# EAGLE board AVR-Pocket-Programmer-Panel-v11 (EAGLE 6.5.0), part 1 of 2
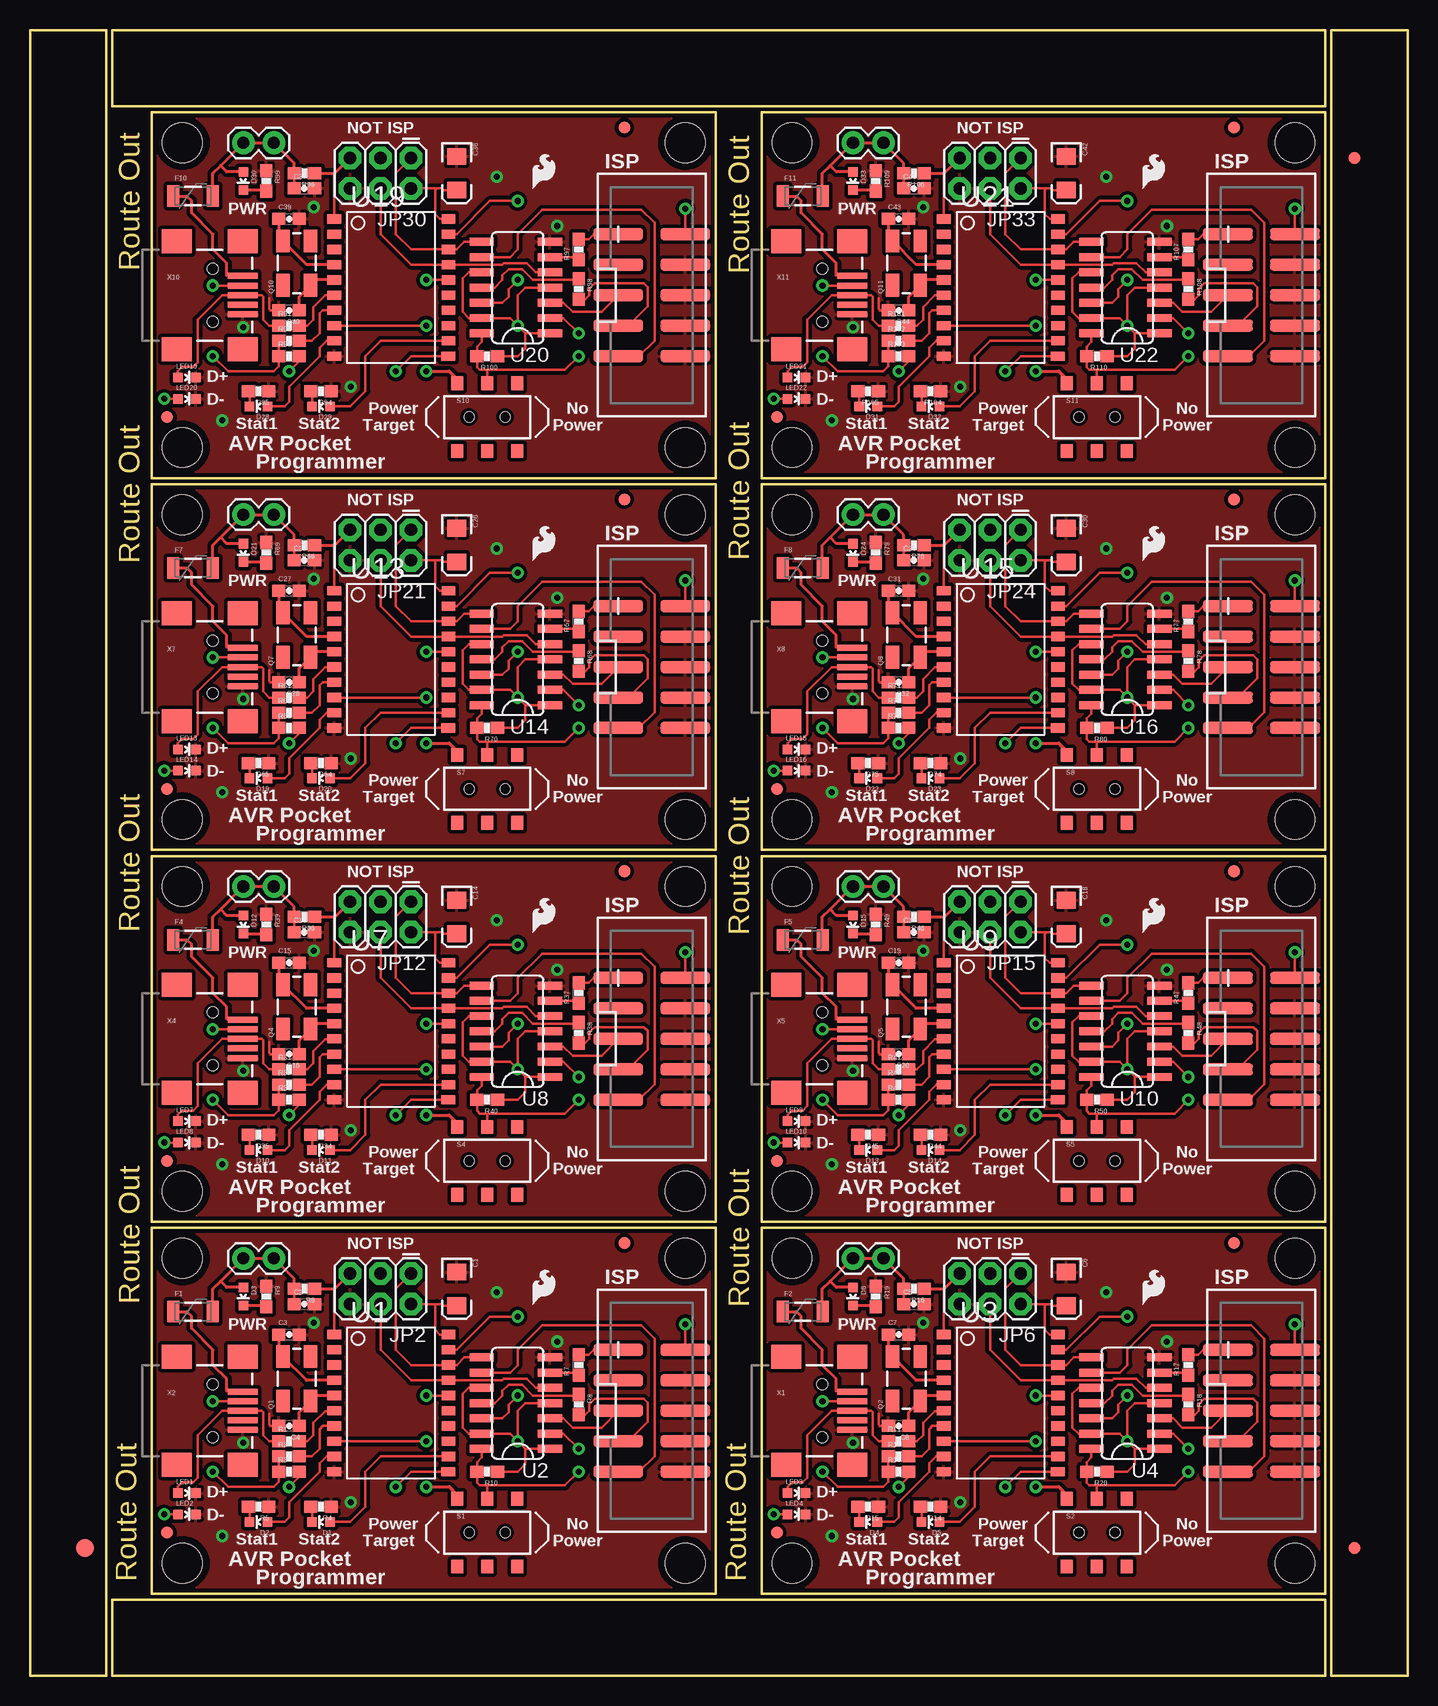
[diagram p0: board, top side]
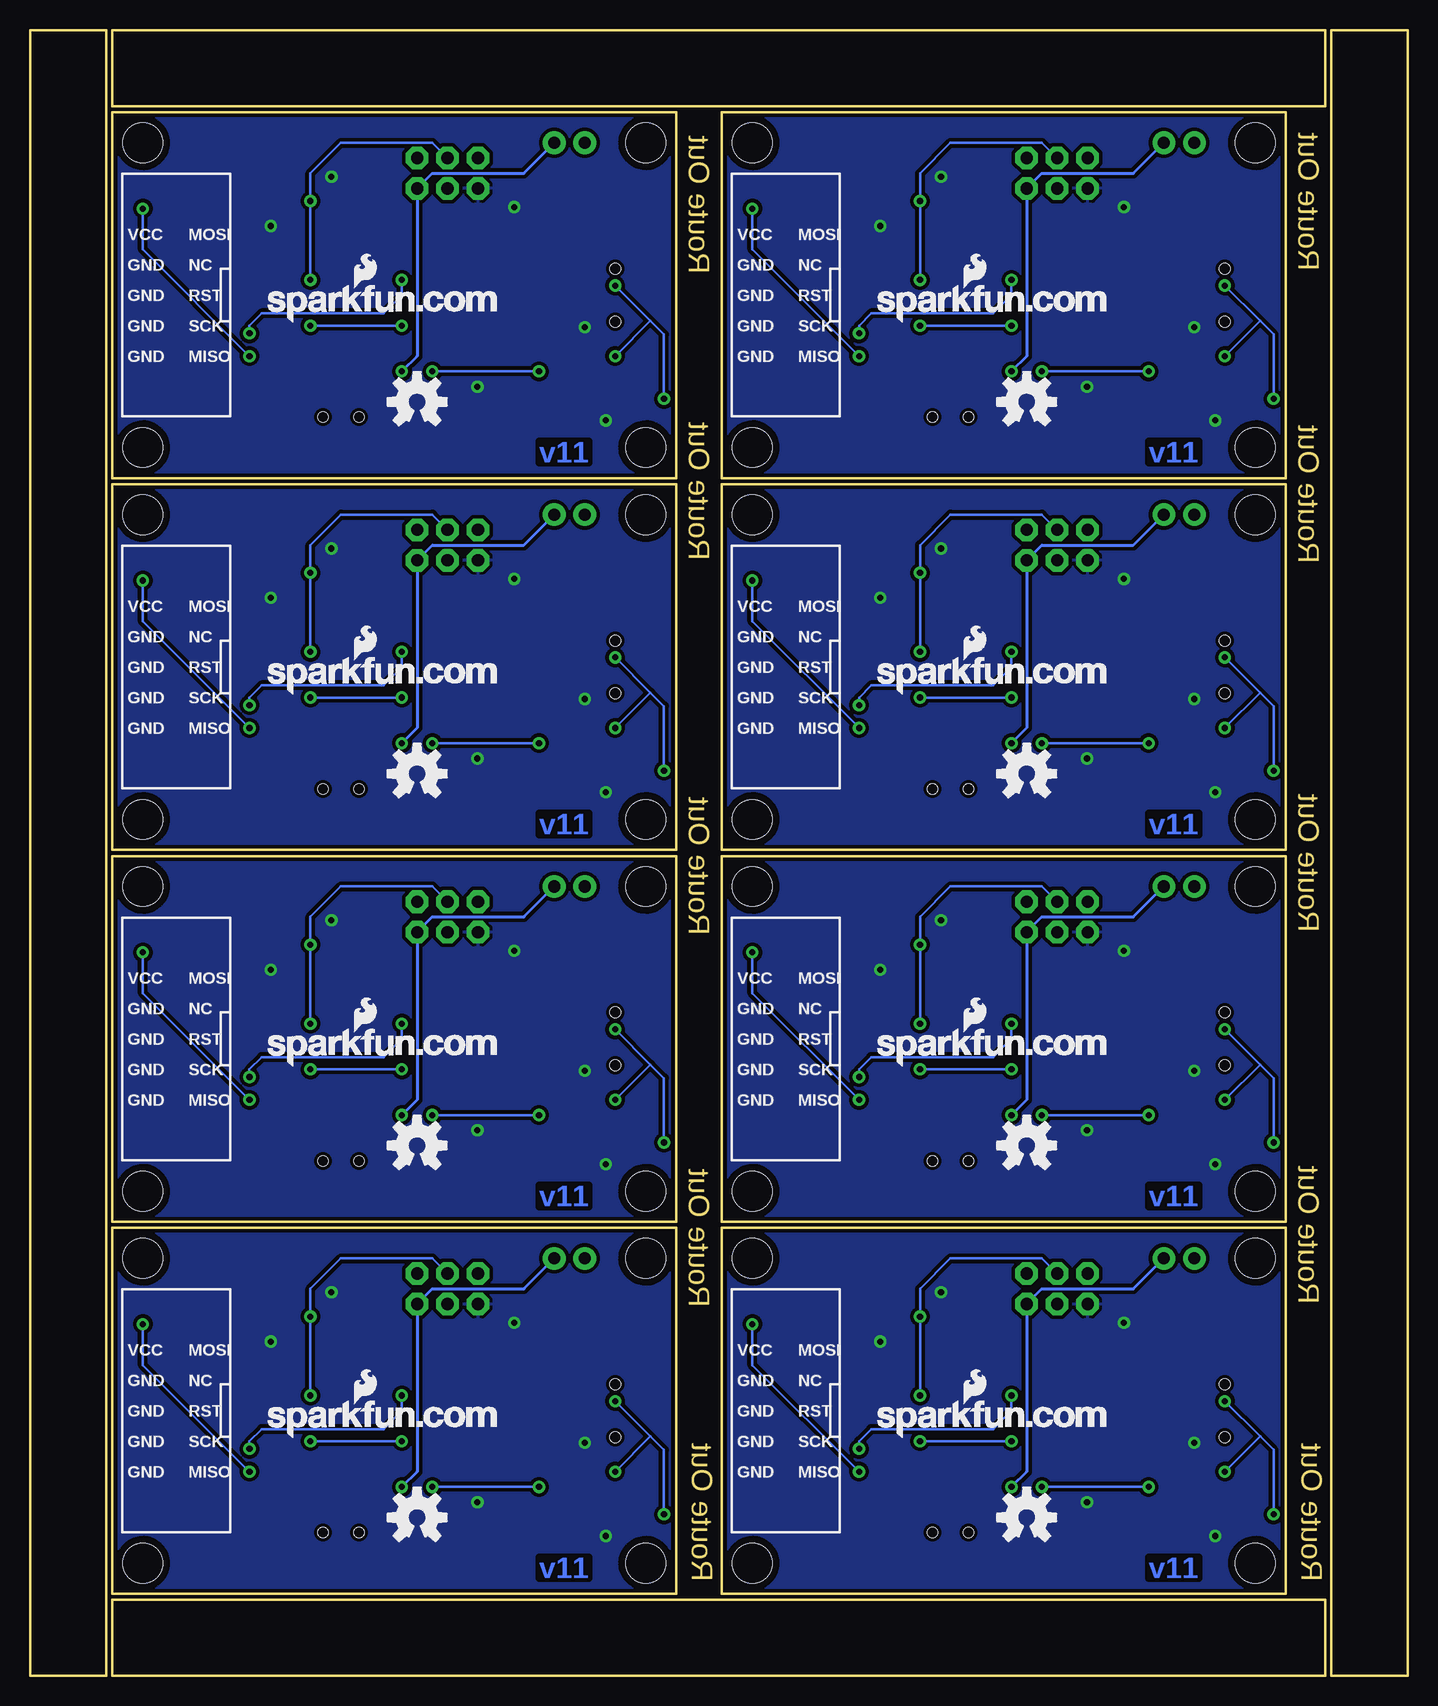
[diagram p1: board, bottom side, seen from below]

Size 114.81 x 137.16 mm. Coordinates in mm from the lower left corner, seen from the top.
Outline: 10.16,37.34 57.15,37.34 57.15,6.86 10.16,6.86 10.16,37.34
Outline: 60.96,37.34 107.95,37.34 107.95,6.86 60.96,6.86 60.96,37.34
Outline: 10.16,68.33 57.15,68.33 57.15,37.85 10.16,37.85 10.16,68.33
Outline: 60.96,68.33 107.95,68.33 107.95,37.85 60.96,37.85 60.96,68.33
Outline: 10.16,99.31 57.15,99.31 57.15,68.83 10.16,68.83 10.16,99.31
Outline: 60.96,99.31 107.95,99.31 107.95,68.83 60.96,68.83 60.96,99.31
Outline: 10.16,130.3 57.15,130.3 57.15,99.82 10.16,99.82 10.16,130.3
Outline: 60.96,130.3 107.95,130.3 107.95,99.82 60.96,99.82 60.96,130.3
Outline: 6.35,0 6.35,137.16 0,137.16 0,0 6.35,0
Outline: 6.86,130.81 107.95,130.81 107.95,137.16 6.86,137.16 6.86,130.81
Outline: 108.46,137.16 108.46,0 114.81,0 114.81,137.16 108.46,137.16
Outline: 107.95,6.35 6.86,6.35 6.86,0 107.95,0 107.95,6.35
Copper layers (1*16): Top 0.035mm / dielectric 1.5mm / Bottom 0.035mm
Design rules "SparkFun": minimum track width 8mil, minimum drill 20mil, track to track 8mil, track to pad 8mil, pad to pad 8mil, via to via 8mil, smd to smd 8mil, copper to edge 10mil, drill to drill 8mil, minimum pad ring 12mil, minimum via ring 10mil, stop-mask expansion 4mil, vias tented up to drill 20mil, thermal gap 10mil
Net classes: 0 default: width 0.203 mm, drill 0.508 mm, clearance 0.203 mm

## Footprints (pad centres in the part's own frame; a part is rotated, then mirrored left to right if it is on the bottom)
EIA3216 = smd 1.4 x 1.6: A 1.4,0; C -1.4,0
0603-CAP = smd 1.1 x 1: 1 -0.85,0; 2 0.85,0
LED-0603 = smd 0.8 x 0.8: A 0,-0.75; C 0,0.75
FIDUCIAL-1.5X3 = smd 1.5 x 1.5: 1 0,0
FIDUCIAL-1X2 = smd 1 x 1: 1 0,0
PTC-1206-WIDE = smd 1 x 1.8: 1 -1.654,0; 2 1.654,0
1X02 = drill 1.016 pad 1.88: 1 0,0; 2 2.54,0
2X3 = drill 1.016 pad 1.88 octagon: 1 0,0; 2 0,2.54; 3 2.54,0; 4 2.54,2.54; 5 5.08,0; 6 5.08,2.54
2X5-SHROUDED_SMD = smd 4.15 x 1: 1 -2.794,5.08; 2 2.794,5.08; 3 -2.794,2.54; 4 2.794,2.54; 5 -2.794,0; 6 2.794,0; 7 -2.794,-2.54; 8 2.794,-2.54; 9 -2.794,-5.08; 10 2.794,-5.08
CRYSTAL-SMD-5X3 = smd 1.9 x 1.1: 1 -1.85,-1.15; 2 1.85,-1.15; 3 1.85,1.15; 4 -1.85,1.15
0603-RES = smd 1.1 x 1: 1 -0.85,0; 2 0.85,0
AYZ0202 = smd 1 x 1.15: 1 -2.5,2.825; 2 0,2.825; 3 2.5,2.825; 4 -2.5,-2.825; 5 0,-2.825; 6 2.5,-2.825 | hole 0.85: 1.5,0; -1.5,0
SO20L = smd 0.762 x 1.143: 1 -5.08,-5.131; 2 -3.81,-5.131; 3 -2.54,-5.131; 4 -1.27,-5.131; 5 0,-5.131; 6 1.27,-5.131; 7 2.54,-5.131; 8 3.81,-5.131; 9 5.08,-5.131; 10 6.35,-5.131; 11 6.35,4.369; 12 5.08,4.394; 13 3.81,4.394; 14 2.54,4.394; 15 1.27,4.394; 16 0,4.394; 17 -1.27,4.394; 18 -2.54,4.394; 19 -3.81,4.394; 20 -5.08,4.394
SO014 = smd 0.66 x 2.032: 1 -3.175,-2.68; 2 -1.905,-2.68; 3 -0.635,-2.68; 4 0.635,-2.68; 5 1.905,-2.68; 6 3.175,-2.68; 7 4.445,-2.68; 8 4.445,2.997; 9 3.175,2.997; 10 1.905,2.997; 11 0.635,2.997; 12 -0.635,2.997; 13 -1.905,2.997; 14 -3.175,2.997
STAND-OFF = hole 3.302: 0,0
USB-MINIB = smd 2.5 x 0.5: D+ 2.5,0; D- 2.5,0.8; GND 2.5,-1.6; ID 2.5,-0.8; VBUS 2.5,1.6 | smd 2.5 x 2: GND@1 -3,-4.5; GND@2 -3,4.5; GND@3 2.5,4.5; GND@4 2.5,-4.5 | hole 0.9: 0,2.2; 0,-2.2

## Placement (x,y rotation side)
C1  10uF  [EIA3216]  35.56,32.26 270 top
C2  0.1uF  [0603-CAP]  22.86,30.99 0 top
C3  22pF  [0603-CAP]  21.59,28.45 0 top
C4  22pF  [0603-CAP]  21.59,20.83 180 top
C5  0.1uF  [0603-CAP]  73.66,30.99 0 top
C6  10uF  [EIA3216]  86.36,32.26 270 top
C7  22pF  [0603-CAP]  72.39,28.45 0 top
C8  22pF  [0603-CAP]  72.39,20.83 180 top
C13  0.1uF  [0603-CAP]  22.86,61.98 0 top
C14  10uF  [EIA3216]  35.56,63.25 270 top
C15  22pF  [0603-CAP]  21.59,59.44 0 top
C16  22pF  [0603-CAP]  21.59,51.82 180 top
C17  0.1uF  [0603-CAP]  73.66,61.98 0 top
C18  10uF  [EIA3216]  86.36,63.25 270 top
C19  22pF  [0603-CAP]  72.39,59.44 0 top
C20  22pF  [0603-CAP]  72.39,51.82 180 top
C25  0.1uF  [0603-CAP]  22.86,92.96 0 top
C26  10uF  [EIA3216]  35.56,94.23 270 top
C27  22pF  [0603-CAP]  21.59,90.42 0 top
C28  22pF  [0603-CAP]  21.59,82.8 180 top
C29  0.1uF  [0603-CAP]  73.66,92.96 0 top
C30  10uF  [EIA3216]  86.36,94.23 270 top
C31  22pF  [0603-CAP]  72.39,90.42 0 top
C32  22pF  [0603-CAP]  72.39,82.8 180 top
C37  0.1uF  [0603-CAP]  22.86,123.95 0 top
C38  10uF  [EIA3216]  35.56,125.22 270 top
C39  22pF  [0603-CAP]  21.59,121.41 0 top
C40  22pF  [0603-CAP]  21.59,113.79 180 top
C41  0.1uF  [0603-CAP]  73.66,123.95 0 top
C42  10uF  [EIA3216]  86.36,125.22 270 top
C43  22pF  [0603-CAP]  72.39,121.41 0 top
C44  22pF  [0603-CAP]  72.39,113.79 180 top
D1  Blue  [LED-0603]  24.26,12.83 90 top
D2  Red  [LED-0603]  19.05,12.83 90 top
D3  Blue  [LED-0603]  17.78,31.62 180 top
D4  Red  [LED-0603]  69.85,12.83 90 top
D5  Blue  [LED-0603]  75.06,12.83 90 top
D6  Blue  [LED-0603]  68.58,31.62 180 top
D10  Red  [LED-0603]  19.05,43.81 90 top
D11  Blue  [LED-0603]  24.26,43.81 90 top
D12  Blue  [LED-0603]  17.78,62.61 180 top
D13  Red  [LED-0603]  69.85,43.81 90 top
D14  Blue  [LED-0603]  75.06,43.81 90 top
D15  Blue  [LED-0603]  68.58,62.61 180 top
D19  Red  [LED-0603]  19.05,74.8 90 top
D20  Blue  [LED-0603]  24.26,74.8 90 top
D21  Blue  [LED-0603]  17.78,93.6 180 top
D22  Red  [LED-0603]  69.85,74.8 90 top
D23  Blue  [LED-0603]  75.06,74.8 90 top
D24  Blue  [LED-0603]  68.58,93.6 180 top
D28  Red  [LED-0603]  19.05,105.79 90 top
D29  Blue  [LED-0603]  24.26,105.79 90 top
D30  Blue  [LED-0603]  17.78,124.59 180 top
D31  Red  [LED-0603]  69.85,105.79 90 top
D32  Blue  [LED-0603]  75.06,105.79 90 top
D33  Blue  [LED-0603]  68.58,124.59 180 top
E$1  [FIDUCIAL-1.5X3]  4.57,10.67 0 top
E$5  [FIDUCIAL-1X2]  110.36,126.49 180 top
E$6  [FIDUCIAL-1X2]  110.36,10.67 0 top
F1  500mA  [PTC-1206-WIDE]  13.59,30.35 0 top
F2  500mA  [PTC-1206-WIDE]  64.39,30.35 0 top
F4  500mA  [PTC-1206-WIDE]  13.59,61.34 0 top
F5  500mA  [PTC-1206-WIDE]  64.39,61.34 0 top
F7  500mA  [PTC-1206-WIDE]  13.59,92.33 0 top
F8  500mA  [PTC-1206-WIDE]  64.39,92.33 0 top
F10  500mA  [PTC-1206-WIDE]  13.59,123.32 0 top
F11  500mA  [PTC-1206-WIDE]  64.39,123.32 0 top
JP1  Power Select  [1X02]  17.78,34.8 0 top
JP2  AVR_SPI_PRG_6PTH  [2X3]  31.75,33.53 180 top
JP3  AVR_SPI_PROG2SHROUDED_SMD  [2X5-SHROUDED_SMD]  51.82,22.1 0 top
JP4  Power Select  [1X02]  68.58,34.8 0 top
JP5  AVR_SPI_PROG2SHROUDED_SMD  [2X5-SHROUDED_SMD]  102.62,22.1 0 top
JP6  AVR_SPI_PRG_6PTH  [2X3]  82.55,33.53 180 top
JP10  Power Select  [1X02]  17.78,65.79 0 top
JP11  AVR_SPI_PROG2SHROUDED_SMD  [2X5-SHROUDED_SMD]  51.82,53.09 0 top
JP12  AVR_SPI_PRG_6PTH  [2X3]  31.75,64.52 180 top
JP13  Power Select  [1X02]  68.58,65.79 0 top
JP14  AVR_SPI_PROG2SHROUDED_SMD  [2X5-SHROUDED_SMD]  102.62,53.09 0 top
JP15  AVR_SPI_PRG_6PTH  [2X3]  82.55,64.52 180 top
JP19  Power Select  [1X02]  17.78,96.77 0 top
JP20  AVR_SPI_PROG2SHROUDED_SMD  [2X5-SHROUDED_SMD]  51.82,84.07 0 top
JP21  AVR_SPI_PRG_6PTH  [2X3]  31.75,95.5 180 top
JP22  Power Select  [1X02]  68.58,96.77 0 top
JP23  AVR_SPI_PROG2SHROUDED_SMD  [2X5-SHROUDED_SMD]  102.62,84.07 0 top
JP24  AVR_SPI_PRG_6PTH  [2X3]  82.55,95.5 180 top
JP28  Power Select  [1X02]  17.78,127.76 0 top
JP29  AVR_SPI_PROG2SHROUDED_SMD  [2X5-SHROUDED_SMD]  51.82,115.06 0 top
JP30  AVR_SPI_PRG_6PTH  [2X3]  31.75,126.49 180 top
JP31  Power Select  [1X02]  68.58,127.76 0 top
JP32  AVR_SPI_PROG2SHROUDED_SMD  [2X5-SHROUDED_SMD]  102.62,115.06 0 top
JP33  AVR_SPI_PRG_6PTH  [2X3]  82.55,126.49 180 top
LED1  Blue  [LED-0603]  13.08,15.24 270 top
LED2  Blue  [LED-0603]  13.08,13.46 270 top
LED3  Blue  [LED-0603]  63.88,15.24 270 top
LED4  Blue  [LED-0603]  63.88,13.46 270 top
LED7  Blue  [LED-0603]  13.08,46.23 270 top
LED8  Blue  [LED-0603]  13.08,44.45 270 top
LED9  Blue  [LED-0603]  63.88,46.23 270 top
LED10  Blue  [LED-0603]  63.88,44.45 270 top
LED13  Blue  [LED-0603]  13.08,77.22 270 top
LED14  Blue  [LED-0603]  13.08,75.44 270 top
LED15  Blue  [LED-0603]  63.88,77.22 270 top
LED16  Blue  [LED-0603]  63.88,75.44 270 top
LED19  Blue  [LED-0603]  13.08,108.2 270 top
LED20  Blue  [LED-0603]  13.08,106.43 270 top
LED21  Blue  [LED-0603]  63.88,108.2 270 top
LED22  Blue  [LED-0603]  63.88,106.43 270 top
LOGO1  OSHW-LOGOM  [OSHW-LOGO-M]  31.75,13.21 0 bottom
LOGO2  OSHW-LOGOM  [OSHW-LOGO-M]  82.55,13.21 0 bottom
LOGO4  OSHW-LOGOM  [OSHW-LOGO-M]  31.75,44.2 0 bottom
LOGO5  OSHW-LOGOM  [OSHW-LOGO-M]  82.55,44.2 0 bottom
LOGO7  OSHW-LOGOM  [OSHW-LOGO-M]  31.75,75.18 0 bottom
LOGO8  OSHW-LOGOM  [OSHW-LOGO-M]  82.55,75.18 0 bottom
LOGO10  OSHW-LOGOM  [OSHW-LOGO-M]  31.75,106.17 0 bottom
LOGO11  OSHW-LOGOM  [OSHW-LOGO-M]  82.55,106.17 0 bottom
Q1  12 MHz  [CRYSTAL-SMD-5X3]  22.23,24.77 90 top
Q2  12 MHz  [CRYSTAL-SMD-5X3]  73.03,24.77 90 top
Q4  12 MHz  [CRYSTAL-SMD-5X3]  22.23,55.75 90 top
Q5  12 MHz  [CRYSTAL-SMD-5X3]  73.03,55.75 90 top
Q7  12 MHz  [CRYSTAL-SMD-5X3]  22.23,86.74 90 top
Q8  12 MHz  [CRYSTAL-SMD-5X3]  73.03,86.74 90 top
Q10  12 MHz  [CRYSTAL-SMD-5X3]  22.23,117.73 90 top
Q11  12 MHz  [CRYSTAL-SMD-5X3]  73.03,117.73 90 top
R1  27  [0603-RES]  21.59,19.56 0 top
R2  27  [0603-RES]  21.59,18.29 0 top
R3  1.5K  [0603-RES]  21.59,17.02 0 top
R4  1K  [0603-RES]  24.26,14.1 180 top
R5  1K  [0603-RES]  19.05,14.1 180 top
R6  1K  [0603-RES]  22.86,32.26 180 top
R7  100  [0603-RES]  45.72,25.91 90 top
R8  100  [0603-RES]  45.72,22.61 270 top
R9  1K  [0603-RES]  19.68,31.62 270 top
R10  22K  [0603-RES]  38.1,17.02 180 top
R11  27  [0603-RES]  72.39,19.56 0 top
R12  27  [0603-RES]  72.39,18.29 0 top
R13  1.5K  [0603-RES]  72.39,17.02 0 top
R14  1K  [0603-RES]  75.06,14.1 180 top
R15  1K  [0603-RES]  69.85,14.1 180 top
R16  1K  [0603-RES]  73.66,32.26 180 top
R17  100  [0603-RES]  96.52,25.91 90 top
R18  100  [0603-RES]  96.52,22.61 270 top
R19  1K  [0603-RES]  70.48,31.62 270 top
R20  22K  [0603-RES]  88.9,17.02 180 top
R31  27  [0603-RES]  21.59,50.55 0 top
R32  27  [0603-RES]  21.59,49.28 0 top
R33  1.5K  [0603-RES]  21.59,48.01 0 top
R34  1K  [0603-RES]  24.26,45.09 180 top
R35  1K  [0603-RES]  19.05,45.09 180 top
R36  1K  [0603-RES]  22.86,63.25 180 top
R37  100  [0603-RES]  45.72,56.9 90 top
R38  100  [0603-RES]  45.72,53.59 270 top
R39  1K  [0603-RES]  19.68,62.61 270 top
R40  22K  [0603-RES]  38.1,48.01 180 top
R41  27  [0603-RES]  72.39,50.55 0 top
R42  27  [0603-RES]  72.39,49.28 0 top
R43  1.5K  [0603-RES]  72.39,48.01 0 top
R44  1K  [0603-RES]  75.06,45.09 180 top
R45  1K  [0603-RES]  69.85,45.09 180 top
R46  1K  [0603-RES]  73.66,63.25 180 top
R47  100  [0603-RES]  96.52,56.9 90 top
R48  100  [0603-RES]  96.52,53.59 270 top
R49  1K  [0603-RES]  70.48,62.61 270 top
R50  22K  [0603-RES]  88.9,48.01 180 top
R61  27  [0603-RES]  21.59,81.53 0 top
R62  27  [0603-RES]  21.59,80.26 0 top
R63  1.5K  [0603-RES]  21.59,78.99 0 top
R64  1K  [0603-RES]  24.26,76.07 180 top
R65  1K  [0603-RES]  19.05,76.07 180 top
R66  1K  [0603-RES]  22.86,94.23 180 top
R67  100  [0603-RES]  45.72,87.88 90 top
R68  100  [0603-RES]  45.72,84.58 270 top
R69  1K  [0603-RES]  19.68,93.6 270 top
R70  22K  [0603-RES]  38.1,78.99 180 top
R71  27  [0603-RES]  72.39,81.53 0 top
R72  27  [0603-RES]  72.39,80.26 0 top
R73  1.5K  [0603-RES]  72.39,78.99 0 top
R74  1K  [0603-RES]  75.06,76.07 180 top
R75  1K  [0603-RES]  69.85,76.07 180 top
R76  1K  [0603-RES]  73.66,94.23 180 top
R77  100  [0603-RES]  96.52,87.88 90 top
R78  100  [0603-RES]  96.52,84.58 270 top
R79  1K  [0603-RES]  70.48,93.6 270 top
R80  22K  [0603-RES]  88.9,78.99 180 top
R91  27  [0603-RES]  21.59,112.52 0 top
R92  27  [0603-RES]  21.59,111.25 0 top
R93  1.5K  [0603-RES]  21.59,109.98 0 top
R94  1K  [0603-RES]  24.26,107.06 180 top
R95  1K  [0603-RES]  19.05,107.06 180 top
R96  1K  [0603-RES]  22.86,125.22 180 top
R97  100  [0603-RES]  45.72,118.87 90 top
R98  100  [0603-RES]  45.72,115.57 270 top
R99  1K  [0603-RES]  19.68,124.59 270 top
R100  22K  [0603-RES]  38.1,109.98 180 top
R101  27  [0603-RES]  72.39,112.52 0 top
R102  27  [0603-RES]  72.39,111.25 0 top
R103  1.5K  [0603-RES]  72.39,109.98 0 top
R104  1K  [0603-RES]  75.06,107.06 180 top
R105  1K  [0603-RES]  69.85,107.06 180 top
R106  1K  [0603-RES]  73.66,125.22 180 top
R107  100  [0603-RES]  96.52,118.87 90 top
R108  100  [0603-RES]  96.52,115.57 270 top
R109  1K  [0603-RES]  70.48,124.59 270 top
R110  22K  [0603-RES]  88.9,109.98 180 top
S1  Power Select  [AYZ0202]  38.1,11.94 0 top
S2  Power Select  [AYZ0202]  88.9,11.94 0 top
S4  Power Select  [AYZ0202]  38.1,42.93 0 top
S5  Power Select  [AYZ0202]  88.9,42.93 0 top
S7  Power Select  [AYZ0202]  38.1,73.91 0 top
S8  Power Select  [AYZ0202]  88.9,73.91 0 top
S10  Power Select  [AYZ0202]  38.1,104.9 0 top
S11  Power Select  [AYZ0202]  88.9,104.9 0 top
U1  ATTINY2313-20S  [SO20L]  30.48,23.37 270 top
U2  74ACT125D  [SO014]  40.64,22.1 90 top
U3  ATTINY2313-20S  [SO20L]  81.28,23.37 270 top
U4  74ACT125D  [SO014]  91.44,22.1 90 top
U7  ATTINY2313-20S  [SO20L]  30.48,54.36 270 top
U8  74ACT125D  [SO014]  40.64,53.09 90 top
U9  ATTINY2313-20S  [SO20L]  81.28,54.36 270 top
U10  74ACT125D  [SO014]  91.44,53.09 90 top
U13  ATTINY2313-20S  [SO20L]  30.48,85.34 270 top
U14  74ACT125D  [SO014]  40.64,84.07 90 top
U15  ATTINY2313-20S  [SO20L]  81.28,85.34 270 top
U16  74ACT125D  [SO014]  91.44,84.07 90 top
U19  ATTINY2313-20S  [SO20L]  30.48,116.33 270 top
U20  74ACT125D  [SO014]  40.64,115.06 90 top
U21  ATTINY2313-20S  [SO20L]  81.28,116.33 270 top
U22  74ACT125D  [SO014]  91.44,115.06 90 top
U$1  STAND-OFF  [STAND-OFF]  12.7,9.4 0 top
U$2  LOGO-SFESK  [SFE-LOGO-FLAME]  41.91,30.99 0 top
U$3  STAND-OFF  [STAND-OFF]  12.7,34.8 0 top
U$4  STAND-OFF  [STAND-OFF]  54.61,34.8 0 top
U$5  STAND-OFF  [STAND-OFF]  54.61,9.4 0 top
U$6  FIDUCIAL1X2  [FIDUCIAL-1X2]  11.43,11.94 0 top
U$7  FIDUCIAL1X2  [FIDUCIAL-1X2]  49.53,36.07 0 top
U$8  LOGO-SFENEW  [SFE-NEW-WEBLOGO]  44.2,19.81 0 bottom
U$9  STAND-OFF  [STAND-OFF]  63.5,9.4 0 top
U$10  STAND-OFF  [STAND-OFF]  63.5,34.8 0 top
U$11  STAND-OFF  [STAND-OFF]  105.41,34.8 0 top
U$12  STAND-OFF  [STAND-OFF]  105.41,9.4 0 top
U$13  FIDUCIAL1X2  [FIDUCIAL-1X2]  62.23,11.94 0 top
U$14  FIDUCIAL1X2  [FIDUCIAL-1X2]  100.33,36.07 0 top
U$15  LOGO-SFENEW  [SFE-NEW-WEBLOGO]  95,19.81 0 bottom
U$16  LOGO-SFESK  [SFE-LOGO-FLAME]  92.71,30.99 0 top
U$25  STAND-OFF  [STAND-OFF]  12.7,40.39 0 top
U$26  STAND-OFF  [STAND-OFF]  12.7,65.79 0 top
U$27  STAND-OFF  [STAND-OFF]  54.61,65.79 0 top
U$28  STAND-OFF  [STAND-OFF]  54.61,40.39 0 top
U$29  FIDUCIAL1X2  [FIDUCIAL-1X2]  11.43,42.93 0 top
U$30  FIDUCIAL1X2  [FIDUCIAL-1X2]  49.53,67.06 0 top
U$31  LOGO-SFENEW  [SFE-NEW-WEBLOGO]  44.2,50.8 0 bottom
U$32  LOGO-SFESK  [SFE-LOGO-FLAME]  41.91,61.98 0 top
U$33  STAND-OFF  [STAND-OFF]  63.5,40.39 0 top
U$34  STAND-OFF  [STAND-OFF]  63.5,65.79 0 top
U$35  STAND-OFF  [STAND-OFF]  105.41,65.79 0 top
U$36  STAND-OFF  [STAND-OFF]  105.41,40.39 0 top
U$37  FIDUCIAL1X2  [FIDUCIAL-1X2]  62.23,42.93 0 top
U$38  FIDUCIAL1X2  [FIDUCIAL-1X2]  100.33,67.06 0 top
U$39  LOGO-SFENEW  [SFE-NEW-WEBLOGO]  95,50.8 0 bottom
U$40  LOGO-SFESK  [SFE-LOGO-FLAME]  92.71,61.98 0 top
U$49  STAND-OFF  [STAND-OFF]  12.7,71.37 0 top
U$50  STAND-OFF  [STAND-OFF]  12.7,96.77 0 top
U$51  STAND-OFF  [STAND-OFF]  54.61,96.77 0 top
U$52  STAND-OFF  [STAND-OFF]  54.61,71.37 0 top
U$53  FIDUCIAL1X2  [FIDUCIAL-1X2]  11.43,73.91 0 top
U$54  FIDUCIAL1X2  [FIDUCIAL-1X2]  49.53,98.04 0 top
U$55  LOGO-SFENEW  [SFE-NEW-WEBLOGO]  44.2,81.79 0 bottom
U$56  LOGO-SFESK  [SFE-LOGO-FLAME]  41.91,92.96 0 top
U$57  STAND-OFF  [STAND-OFF]  63.5,71.37 0 top
U$58  STAND-OFF  [STAND-OFF]  63.5,96.77 0 top
U$59  STAND-OFF  [STAND-OFF]  105.41,96.77 0 top
U$60  STAND-OFF  [STAND-OFF]  105.41,71.37 0 top
U$61  FIDUCIAL1X2  [FIDUCIAL-1X2]  62.23,73.91 0 top
U$62  FIDUCIAL1X2  [FIDUCIAL-1X2]  100.33,98.04 0 top
U$63  LOGO-SFENEW  [SFE-NEW-WEBLOGO]  95,81.79 0 bottom
U$64  LOGO-SFESK  [SFE-LOGO-FLAME]  92.71,92.96 0 top
U$73  STAND-OFF  [STAND-OFF]  12.7,102.36 0 top
U$74  STAND-OFF  [STAND-OFF]  12.7,127.76 0 top
U$75  STAND-OFF  [STAND-OFF]  54.61,127.76 0 top
U$76  STAND-OFF  [STAND-OFF]  54.61,102.36 0 top
U$77  FIDUCIAL1X2  [FIDUCIAL-1X2]  11.43,104.9 0 top
U$78  FIDUCIAL1X2  [FIDUCIAL-1X2]  49.53,129.03 0 top
U$79  LOGO-SFENEW  [SFE-NEW-WEBLOGO]  44.2,112.78 0 bottom
U$80  LOGO-SFESK  [SFE-LOGO-FLAME]  41.91,123.95 0 top
U$81  STAND-OFF  [STAND-OFF]  63.5,102.36 0 top
U$82  STAND-OFF  [STAND-OFF]  63.5,127.76 0 top
U$83  STAND-OFF  [STAND-OFF]  105.41,127.76 0 top
U$84  STAND-OFF  [STAND-OFF]  105.41,102.36 0 top
U$85  FIDUCIAL1X2  [FIDUCIAL-1X2]  62.23,104.9 0 top
U$86  FIDUCIAL1X2  [FIDUCIAL-1X2]  100.33,129.03 0 top
U$87  LOGO-SFENEW  [SFE-NEW-WEBLOGO]  95,112.78 0 bottom
U$88  LOGO-SFESK  [SFE-LOGO-FLAME]  92.71,123.95 0 top
X1  USBSMD  [USB-MINIB]  66.04,22.1 0 top
X2  USBSMD  [USB-MINIB]  15.24,22.1 0 top
X4  USBSMD  [USB-MINIB]  15.24,53.09 0 top
X5  USBSMD  [USB-MINIB]  66.04,53.09 0 top
X7  USBSMD  [USB-MINIB]  15.24,84.07 0 top
X8  USBSMD  [USB-MINIB]  66.04,84.07 0 top
X10  USBSMD  [USB-MINIB]  15.24,115.06 0 top
X11  USBSMD  [USB-MINIB]  66.04,115.06 0 top

## Library data of the parts
C1-C8 C13-C20 C25-C32 C37-C44 D1-D6 D10-D15 D19-D24 D28-D33 JP1-JP6 JP10-JP15 JP19-JP24 JP28-JP33 LED1-LED4 LED7-LED10 LED13-LED16 LED19-LED22 Q1 Q2 Q4 Q5 Q7 Q8 Q10 Q11 R1-R20 R31-R50 R61-R80 R91-R110 S1 S2 S4 S5 S7 S8 S10 S11 U2 U4 U8 U10 U14 U16 U20 U22 U$1-U$16 U$25-U$40 U$49-U$64 U$73-U$88 X1 X2 X4 X5 X7 X8 X10 X11 = SparkFun
E$1 E$5 E$6 LOGO1 LOGO2 LOGO4 LOGO5 LOGO7 LOGO8 LOGO10 LOGO11 = SparkFun-Aesthetics
F1 F2 F4 F5 F7 F8 F10 F11 = SparkFun-PowerIC
U1 U3 U7 U9 U13 U15 U19 U21 = avr

## Nets
CTL: R10.1 U1.8 U2.1 U2.4 U2.10 U2.13
CTL1: R20.1 U3.8 U4.1 U4.4 U4.10 U4.13
CTL3: R40.1 U7.8 U8.1 U8.4 U8.10 U8.13
CTL4: R50.1 U9.8 U10.1 U10.4 U10.10 U10.13
CTL6: R70.1 U13.8 U14.1 U14.4 U14.10 U14.13
CTL7: R80.1 U15.8 U16.1 U16.4 U16.10 U16.13
CTL9: R100.1 U19.8 U20.1 U20.4 U20.10 U20.13
CTL10: R110.1 U21.8 U22.1 U22.4 U22.10 U22.13
D+: LED1.A R1.1 X2.D+
D+1: LED3.A R11.1 X1.D+
D+3: LED7.A R31.1 X4.D+
D+4: LED9.A R41.1 X5.D+
D+6: LED13.A R61.1 X7.D+
D+7: LED15.A R71.1 X8.D+
D+9: LED19.A R91.1 X10.D+
D+10: LED21.A R101.1 X11.D+
D-: LED2.A R2.1 R3.1 X2.D-
D-1: LED4.A R12.1 R13.1 X1.D-
D-3: LED8.A R32.1 R33.1 X4.D-
D-4: LED10.A R42.1 R43.1 X5.D-
D-6: LED14.A R62.1 R63.1 X7.D-
D-7: LED16.A R72.1 R73.1 X8.D-
D-9: LED20.A R92.1 R93.1 X10.D-
D-10: LED22.A R102.1 R103.1 X11.D-
GND: C1.C C2.2 C3.2 C4.2 JP2.6 JP3.4 JP3.6 JP3.8 JP3.10 LED1.C LED2.C R4.1 R5.1 R9.1 U1.10 U2.7 X2.GND
GND1: C5.2 C6.C C7.2 C8.2 JP5.4 JP5.6 JP5.8 JP5.10 JP6.6 LED3.C LED4.C R14.1 R15.1 R19.1 U3.10 U4.7 X1.GND
GND3: C13.2 C14.C C15.2 C16.2 JP11.4 JP11.6 JP11.8 JP11.10 JP12.6 LED7.C LED8.C R34.1 R35.1 R39.1 U7.10 U8.7 X4.GND
GND4: C17.2 C18.C C19.2 C20.2 JP14.4 JP14.6 JP14.8 JP14.10 JP15.6 LED9.C LED10.C R44.1 R45.1 R49.1 U9.10 U10.7 X5.GND
GND6: C25.2 C26.C C27.2 C28.2 JP20.4 JP20.6 JP20.8 JP20.10 JP21.6 LED13.C LED14.C R64.1 R65.1 R69.1 U13.10 U14.7 X7.GND
GND7: C29.2 C30.C C31.2 C32.2 JP23.4 JP23.6 JP23.8 JP23.10 JP24.6 LED15.C LED16.C R74.1 R75.1 R79.1 U15.10 U16.7 X8.GND
GND9: C37.2 C38.C C39.2 C40.2 JP29.4 JP29.6 JP29.8 JP29.10 JP30.6 LED19.C LED20.C R94.1 R95.1 R99.1 U19.10 U20.7 X10.GND
GND10: C41.2 C42.C C43.2 C44.2 JP32.4 JP32.6 JP32.8 JP32.10 JP33.6 LED21.C LED22.C R104.1 R105.1 R109.1 U21.10 U22.7 X11.GND
MISO': JP2.1 U1.18 U2.8
MISO'1: JP6.1 U3.18 U4.8
MISO'3: JP12.1 U7.18 U8.8
MISO'4: JP15.1 U9.18 U10.8
MISO'6: JP21.1 U13.18 U14.8
MISO'7: JP24.1 U15.18 U16.8
MISO'9: JP30.1 U19.18 U20.8
MISO'10: JP33.1 U21.18 U22.8
MOSI': JP2.4 U1.17 U2.5
MOSI'1: JP6.4 U3.17 U4.5
MOSI'3: JP12.4 U7.17 U8.5
MOSI'4: JP15.4 U9.17 U10.5
MOSI'6: JP21.4 U13.17 U14.5
MOSI'7: JP24.4 U15.17 U16.5
MOSI'9: JP30.4 U19.17 U20.5
MOSI'10: JP33.4 U21.17 U22.5
N$1: R3.2 U1.11
N$2: D2.A U1.9
N$3: D3.C R9.2
N$4: F1.1 X2.VBUS
N$5: C3.1 Q1.3 U1.4
N$6: C4.1 Q1.1 U1.5
N$7: R13.2 U3.11
N$8: D4.A U3.9
N$9: D5.A U3.12
N$10: D5.C R14.2
N$11: D4.C R15.2
N$12: R17.1 U4.6
N$13: R18.1 U4.11
N$14: D6.C R19.2
N$15: F2.1 X1.VBUS
N$16: C7.1 Q2.3 U3.4
N$17: D1.A U1.12
N$18: D1.C R4.2
N$19: D2.C R5.2
N$20: C8.1 Q2.1 U3.5
N$22: R7.1 U2.6
N$25: R8.1 U2.11
N$34: R33.2 U7.11
N$35: D10.A U7.9
N$36: D11.A U7.12
N$37: D11.C R34.2
N$38: D10.C R35.2
N$39: R37.1 U8.6
N$40: R38.1 U8.11
N$41: D12.C R39.2
N$42: F4.1 X4.VBUS
N$43: C15.1 Q4.3 U7.4
N$44: C16.1 Q4.1 U7.5
N$45: R43.2 U9.11
N$46: D13.A U9.9
N$47: D14.A U9.12
N$48: D14.C R44.2
N$49: D13.C R45.2
N$50: R47.1 U10.6
N$51: R48.1 U10.11
N$52: D15.C R49.2
N$53: F5.1 X5.VBUS
N$54: C19.1 Q5.3 U9.4
N$55: C20.1 Q5.1 U9.5
N$67: R63.2 U13.11
N$68: D19.A U13.9
N$69: D20.A U13.12
N$70: D20.C R64.2
N$71: D19.C R65.2
N$72: R67.1 U14.6
N$73: R68.1 U14.11
N$74: D21.C R69.2
N$75: F7.1 X7.VBUS
N$76: C27.1 Q7.3 U13.4
N$77: C28.1 Q7.1 U13.5
N$78: R73.2 U15.11
N$79: D22.A U15.9
N$80: D23.A U15.12
N$81: D23.C R74.2
N$82: D22.C R75.2
N$83: R77.1 U16.6
N$84: R78.1 U16.11
N$85: D24.C R79.2
N$86: F8.1 X8.VBUS
N$87: C31.1 Q8.3 U15.4
N$88: C32.1 Q8.1 U15.5
N$100: R93.2 U19.11
N$101: D28.A U19.9
N$102: D29.A U19.12
N$103: D29.C R94.2
N$104: D28.C R95.2
N$105: R97.1 U20.6
N$106: R98.1 U20.11
N$107: D30.C R99.2
N$108: F10.1 X10.VBUS
N$109: C39.1 Q10.3 U19.4
N$110: C40.1 Q10.1 U19.5
N$111: R103.2 U21.11
N$112: D31.A U21.9
N$113: D32.A U21.12
N$114: D32.C R104.2
N$115: D31.C R105.2
N$116: R107.1 U22.6
N$117: R108.1 U22.11
N$118: D33.C R109.2
N$119: F11.1 X11.VBUS
N$120: C43.1 Q11.3 U21.4
N$121: C44.1 Q11.1 U21.5
PD+: R1.2 U1.6
PD+1: R11.2 U3.6
PD+3: R31.2 U7.6
PD+4: R41.2 U9.6
PD+6: R61.2 U13.6
PD+7: R71.2 U15.6
PD+9: R91.2 U19.6
PD+10: R101.2 U21.6
PD-: R2.2 U1.7
PD-1: R12.2 U3.7
PD-3: R32.2 U7.7
PD-4: R42.2 U9.7
PD-6: R62.2 U13.7
PD-7: R72.2 U15.7
PD-9: R92.2 U19.7
PD-10: R102.2 U21.7
RST: JP2.5 R6.1 U1.1
RST1: JP6.5 R16.1 U3.1
RST3: JP12.5 R36.1 U7.1
RST4: JP15.5 R46.1 U9.1
RST6: JP21.5 R66.1 U13.1
RST7: JP24.5 R76.1 U15.1
RST9: JP30.5 R96.1 U19.1
RST10: JP33.5 R106.1 U21.1
RST': U1.16 U2.2
RST'1: U3.16 U4.2
RST'3: U7.16 U8.2
RST'4: U9.16 U10.2
RST'6: U13.16 U14.2
RST'7: U15.16 U16.2
RST'9: U19.16 U20.2
RST'10: U21.16 U22.2
SCK': JP2.3 U1.19 U2.12
SCK'1: JP6.3 U3.19 U4.12
SCK'3: JP12.3 U7.19 U8.12
SCK'4: JP15.3 U9.19 U10.12
SCK'6: JP21.3 U13.19 U14.12
SCK'7: JP24.3 U15.19 U16.12
SCK'9: JP30.3 U19.19 U20.12
SCK'10: JP33.3 U21.19 U22.12
TARGET-MISO: JP3.9 U2.9
TARGET-MISO1: JP5.9 U4.9
TARGET-MISO3: JP11.9 U8.9
TARGET-MISO4: JP14.9 U10.9
TARGET-MISO6: JP20.9 U14.9
TARGET-MISO7: JP23.9 U16.9
TARGET-MISO9: JP29.9 U20.9
TARGET-MISO10: JP32.9 U22.9
TARGET-MOSI: JP3.1 R7.2
TARGET-MOSI1: JP5.1 R17.2
TARGET-MOSI3: JP11.1 R37.2
TARGET-MOSI4: JP14.1 R47.2
TARGET-MOSI6: JP20.1 R67.2
TARGET-MOSI7: JP23.1 R77.2
TARGET-MOSI9: JP29.1 R97.2
TARGET-MOSI10: JP32.1 R107.2
TARGET-PWR: JP3.2 R10.2 S1.2 U2.14
TARGET-PWR1: JP5.2 R20.2 S2.2 U4.14
TARGET-PWR3: JP11.2 R40.2 S4.2 U8.14
TARGET-PWR4: JP14.2 R50.2 S5.2 U10.14
TARGET-PWR6: JP20.2 R70.2 S7.2 U14.14
TARGET-PWR7: JP23.2 R80.2 S8.2 U16.14
TARGET-PWR9: JP29.2 R100.2 S10.2 U20.14
TARGET-PWR10: JP32.2 R110.2 S11.2 U22.14
TARGET-RST: JP3.5 U2.3
TARGET-RST1: JP5.5 U4.3
TARGET-RST3: JP11.5 U8.3
TARGET-RST4: JP14.5 U10.3
TARGET-RST6: JP20.5 U14.3
TARGET-RST7: JP23.5 U16.3
TARGET-RST9: JP29.5 U20.3
TARGET-RST10: JP32.5 U22.3
TARGET-SCK: JP3.7 R8.2
TARGET-SCK1: JP5.7 R18.2
TARGET-SCK3: JP11.7 R38.2
TARGET-SCK4: JP14.7 R48.2
TARGET-SCK6: JP20.7 R68.2
TARGET-SCK7: JP23.7 R78.2
TARGET-SCK9: JP29.7 R98.2
TARGET-SCK10: JP32.7 R108.2
VCC: C1.A C2.1 D3.A F1.2 JP1.1 JP1.2 JP2.2 R6.2 S1.1 U1.20
VCC1: C5.1 C6.A D6.A F2.2 JP4.1 JP4.2 JP6.2 R16.2 S2.1 U3.20
VCC3: C13.1 C14.A D12.A F4.2 JP10.1 JP10.2 JP12.2 R36.2 S4.1 U7.20
VCC4: C17.1 C18.A D15.A F5.2 JP13.1 JP13.2 JP15.2 R46.2 S5.1 U9.20
VCC6: C25.1 C26.A D21.A F7.2 JP19.1 JP19.2 JP21.2 R66.2 S7.1 U13.20
VCC7: C29.1 C30.A D24.A F8.2 JP22.1 JP22.2 JP24.2 R76.2 S8.1 U15.20
VCC9: C37.1 C38.A D30.A F10.2 JP28.1 JP28.2 JP30.2 R96.2 S10.1 U19.20
VCC10: C41.1 C42.A D33.A F11.2 JP31.1 JP31.2 JP33.2 R106.2 S11.1 U21.20